# Altium PCB 起跑V4.3.PcbDoc
Units mm, origin at the board's own origin, x right, y up, seen from the top; angles counter-clockwise.
Board outline 100 x 99.62 mm, 2 copper layers (Top Layer, Bottom Layer); 14 components, 6 nets, 33 pads, 8 vias.
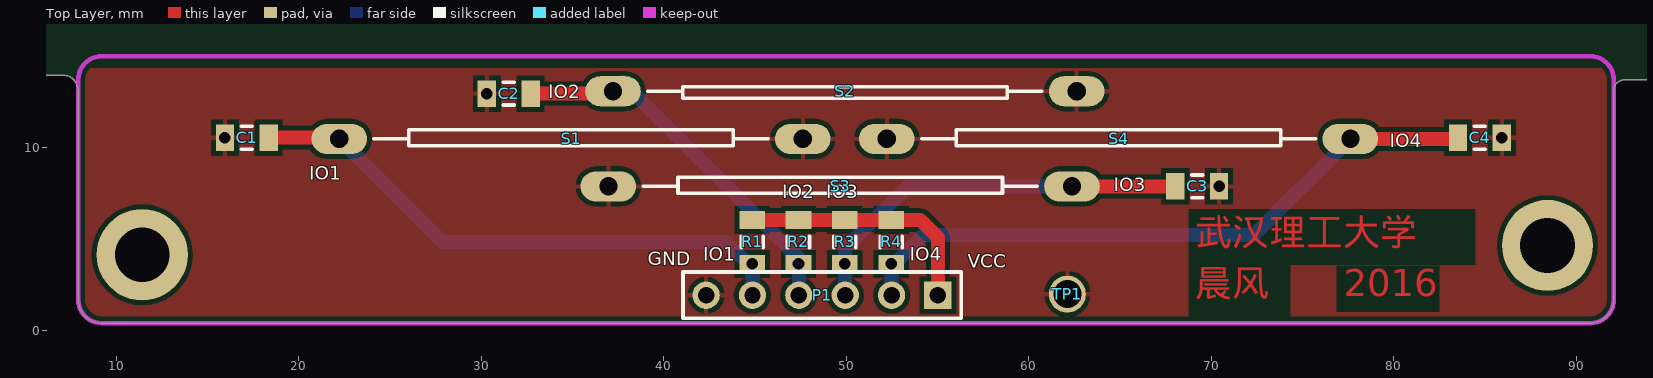
[diagram p0: Top Layer view]
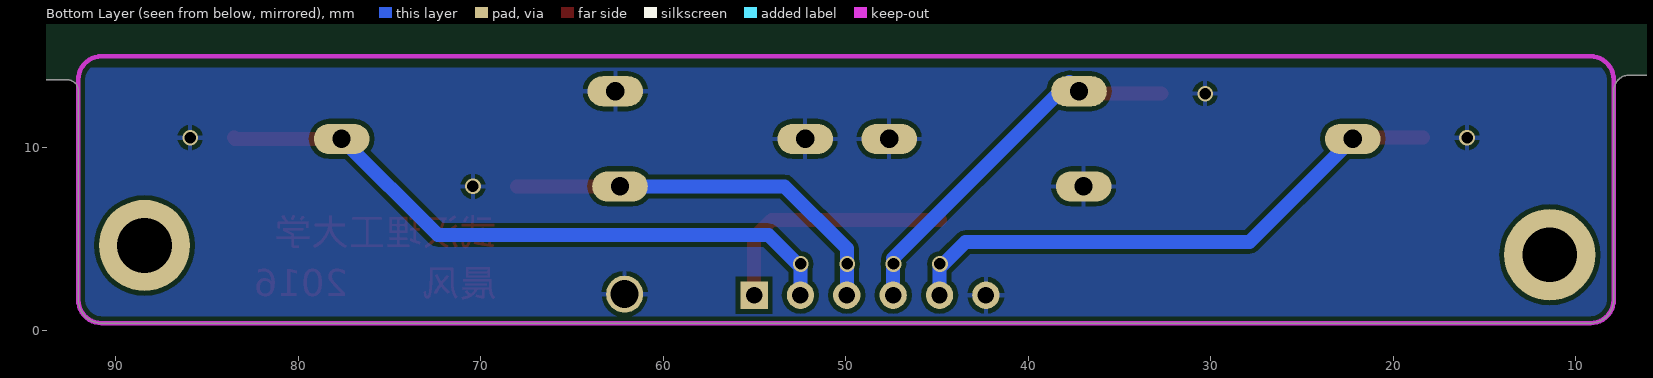
[diagram p1: Bottom Layer view, seen from below]

## Layer stack, top to bottom
Top Layer: signal copper 0.0356
Dielectric: dielectric 0.32, FR-4, Dk 4.8
Bottom Layer: signal copper 0.0356

## Board outline
7.911,1.651 7.911,13.111 ccw(c7.052,13.111) 7.052,13.97 0,13.97 0,100 49.149,100 49.149,98.298 50.8,98.298 50.8,100 100,100 100,13.716 92.643,13.716 ccw(c92.643,13.111) 92.038,13.111 92.038,1.651 cw(c90.768,1.651) 90.768,0.381 9.181,0.381 cw(c9.181,1.651)

## Design rules (kind name [scope] priority, off if disabled: settings)
Clearance [All] p1: gap=0.254
PolygonConnect [All] p1: connectstyle=Relief reliefconductorwidth=0.254 reliefentries=4 polygonreliefangle="90 Angle" airgapwidth=0.254
RoutingVias [All] p1: holewidth=0.711 width=1.27 viastyle="Through Hole" minholewidth=0.711 minwidth=1.27 maxholewidth=0.711 maxwidth=1.27
SolderMaskExpansion [All] p1: expansion=0.102
Width [All] p1: maxlimit=1.27 minlimit=0.254 preferedwidth=0.762 minimp=50.000000 maximp=50.000000 favimp=50.000000
28 further rules are at their usual default settings.

## Components (designator, comment, footprint, x,y, rotation, side; value= is the part's Value field where it differs from the comment)
C1 "Cap" C2012 17.145,10.541 r180 top
C2 "Cap" C2012 31.496,12.954 r180 top
C3 "Cap" C2012 69.215,7.874 r0 top
C4 "Cap" C2012 84.709,10.541 r0 top
P1 "Header 6" HDR1X6 55.01,1.911 r180 top
R1 "Res2" R2012 44.831,4.826 r90 top
R2 "Res2" R2012 47.371,4.826 r90 top
R3 "Res2" R2012 49.911,4.826 r90 top
R4 "Res2" R2012 52.451,4.826 r90 top
S1 "SW-PB" AXIAL-1.0 34.911,10.477 r0 top
S2 "SW-PB" AXIAL-1.0 49.911,13.087 r0 top
S3 "SW-PB" AXIAL-1.0 49.657,7.874 r180 top
S4 "SW-PB" AXIAL-1.0 64.911,10.477 r180 top
TP1 "TEST PAD" PIN 62.103,1.968 r0 top

## Footprints (in the part's own frame and the unit in brackets; to place one, negate y for a bottom-side part, rotate by r counter-clockwise, add the part's x,y. Pads: shape width x height; smd on the part's side, far side on the other; paste and mask are expansions set on the pad)
AXIAL-1.0 [mm] "Axial Device, Thru-Hole; 2 Leads; 1.0 in Pin Spacing"
  oval 3.048x1.65 hole 1: 1(-12.7,0) 2(12.7,0)
  silkscreen extent -10.79,-0.38 10.79,0.51
C2012 [mm] "Chip Capacitor, 2-Leads, Body 2.0x1.2mm, IPC Low Density"
  rect 1x1.45 smd: 1(-1.2,0) 2(1.2,0)
  silkscreen extent -0.3,-0.63 0.3,0.63, body extent -0.98,-0.6 1.02,0.6, height 0.5
HDR1X6 [mm] "Connector; Header; 6 Position"
  rect 1.5x1.5 hole 0.9: 1(0,0)
  round 1.5 hole 0.9: 2(2.54,0) 3(5.08,0) 4(7.62,0) 5(10.16,0) 6(12.7,0)
  silkscreen extent -1.27,-1.27 13.97,1.27, body extent -1.27,-1.27 13.97,1.27, height 7.58
PIN [mil]
  round 80 hole 60: 1(0,0)
R2012 [mm] "Chip Resistor, 2-Leads, Body 2.0x1.2mm, IPC Low Density"
  rect 1x1.4 smd: 1(-1.2,0) 2(1.2,0)
  silkscreen extent -0.3,-0.6 0.3,0.6, body extent -0.98,-0.6 1.02,0.6, height 0.5

## Part data
C1 C2 C3 C4: "贴片电容"
P1: "Header, 6-Pin"
R1 R2 R3 R4: "Resistor"
S1 S2 S3 S4: "Switch"

## Free pads (board coordinates)
  round 5 hole 3: 0(88.411,4.635) 1(11.411,4.127)

## Via types
v1: diameter 0.864, hole 0.635, Top Layer to Bottom Layer, 8 vias

## Nets (pads, with @x,y where several pads share a name; then routed paths per layer and width w, separated by ;. In a path a pad name is that pad's centre, name@x,y a point inside that pad or via, vN(x,y) a via of type N, cw(c..) or ccw(c..) an arc to the next point about the centre after c; other vN are vias at no path point)
GND: C1.2 C2.2 C3.2 C4.2 P1.6 S1.2 S2.2 S3.2 S4.2 TP1.1
  other v1: 70.415,7.874 15.945,10.541 85.909,10.541 30.296,12.954
IO1: C1.1 P1.5 R1.1 S1.1 | length 31
  Top Layer w0.762: C1.1 22.147,10.541 S1.1
  Bottom Layer w0.762: S1.1 27.862,4.826 43.434,4.826 44.85,3.41 P1.5
  other v1: 44.831,3.626
IO2: C2.1 P1.4 R2.1 S2.1 | length 20.5
  Top Layer w0.762: C2.1 37.338,12.954 S2.1@37.465,13.081
  Bottom Layer w0.762: S2.1@37.719,13.589 47.39,3.918 P1.4
  other v1: 47.371,3.626
IO3: C3.1 P1.3 R3.1 S3.1 | length 22.1
  Top Layer w0.762: S3.1 C3.1
  Bottom Layer w0.762: P1.3 49.93,4.464 53.34,7.874 S3.1
  other v1: 49.911,3.626
IO4: C4.1 P1.2 R4.1 S4.1 | length 35.5
  Top Layer w0.762: S4.1 83.445,10.477 C4.1
  Bottom Layer w0.762: P1.2 52.47,3.448 54.229,5.207 72.341,5.207 S4.1
  other v1: 52.451,3.626
VCC: P1.1 R1.2 R2.2 R3.2 R4.2 | length 13.7
  Top Layer w0.762: R1.2 R2.2 R3.2 R4.2 54.045,6.026 55.01,5.061 P1.1

## Polygon pours and split planes (outlines as drawn)
GND on Top Layer "Top Layer-GND" (solid, remove dead copper, pour order 4): 7.874,14.351 92.038,14.351 92.038,10.668 92.038,0.381 88.011,0.381 7.911,0.381 7.911,6.096
GND on Bottom Layer "Top Layer-GND" (solid, remove dead copper, pour order 6): 11.43,14.381 7.911,14.381 7.911,13.111 7.911,0.381 17.653,0.381 92.038,0.381 92.038,12.381 92.038,14.381 89.154,14.381

## Keep-outs
Keep-Out Layer:
  lines w0.254: 7.911,1.651 ccw(c9.181,1.651) 9.181,0.381 9.911,0.381 89.911,0.381 90.768,0.381 ccw(c90.768,1.651) 92.038,1.651 92.038,2.381 92.038,12.381 92.038,13.73 ccw(c90.768,13.73) 90.768,15 77,15 20,15 9.181,15 ccw(c9.181,13.73) 7.911,13.73 7.911,12.381 7.911,2.381 7.911,1.651

## Other copper
Top Layer:
  text "武汉理工大学" at 69.113,4.167 h2.54
  text "晨风" at 69.113,1.373 h2.54
  text "2016" at 77.241,1.373 h2.54

## Silkscreen, mask and mechanical layers (free items; w line width, h text height)
Top Overlay:
  text "IO2" at 33.655,12.446 h1.27
  text "IO4" at 79.756,9.779 h1.27
  text "IO1" at 20.574,8.001 h1.27
  text "IO3" at 64.643,7.366 h1.27
  text "IO2" at 46.482,6.985 h1.27
  text "IO3" at 48.895,6.985 h1.27
  text "IO1" at 42.164,3.556 h1.27
  text "IO4" at 53.467,3.556 h1.27
  text "GND" at 39.116,3.302 h1.27
  text "VCC" at 56.642,3.175 h1.27
Mechanical 15:
  lines w0.254: 11.411,4.635 88.411,4.635